# Altium PCB LTC6268_PCB.PcbDoc
Units mm, origin at the board's own origin, x right, y up, seen from the top; angles counter-clockwise.
Board outline 46.8 x 42.34 mm, 2 copper layers (Top Layer, Bottom Layer); 36 components, 28 nets, 91 pads, 1 vias.
Unrouted connection lines stored in the file: 73.
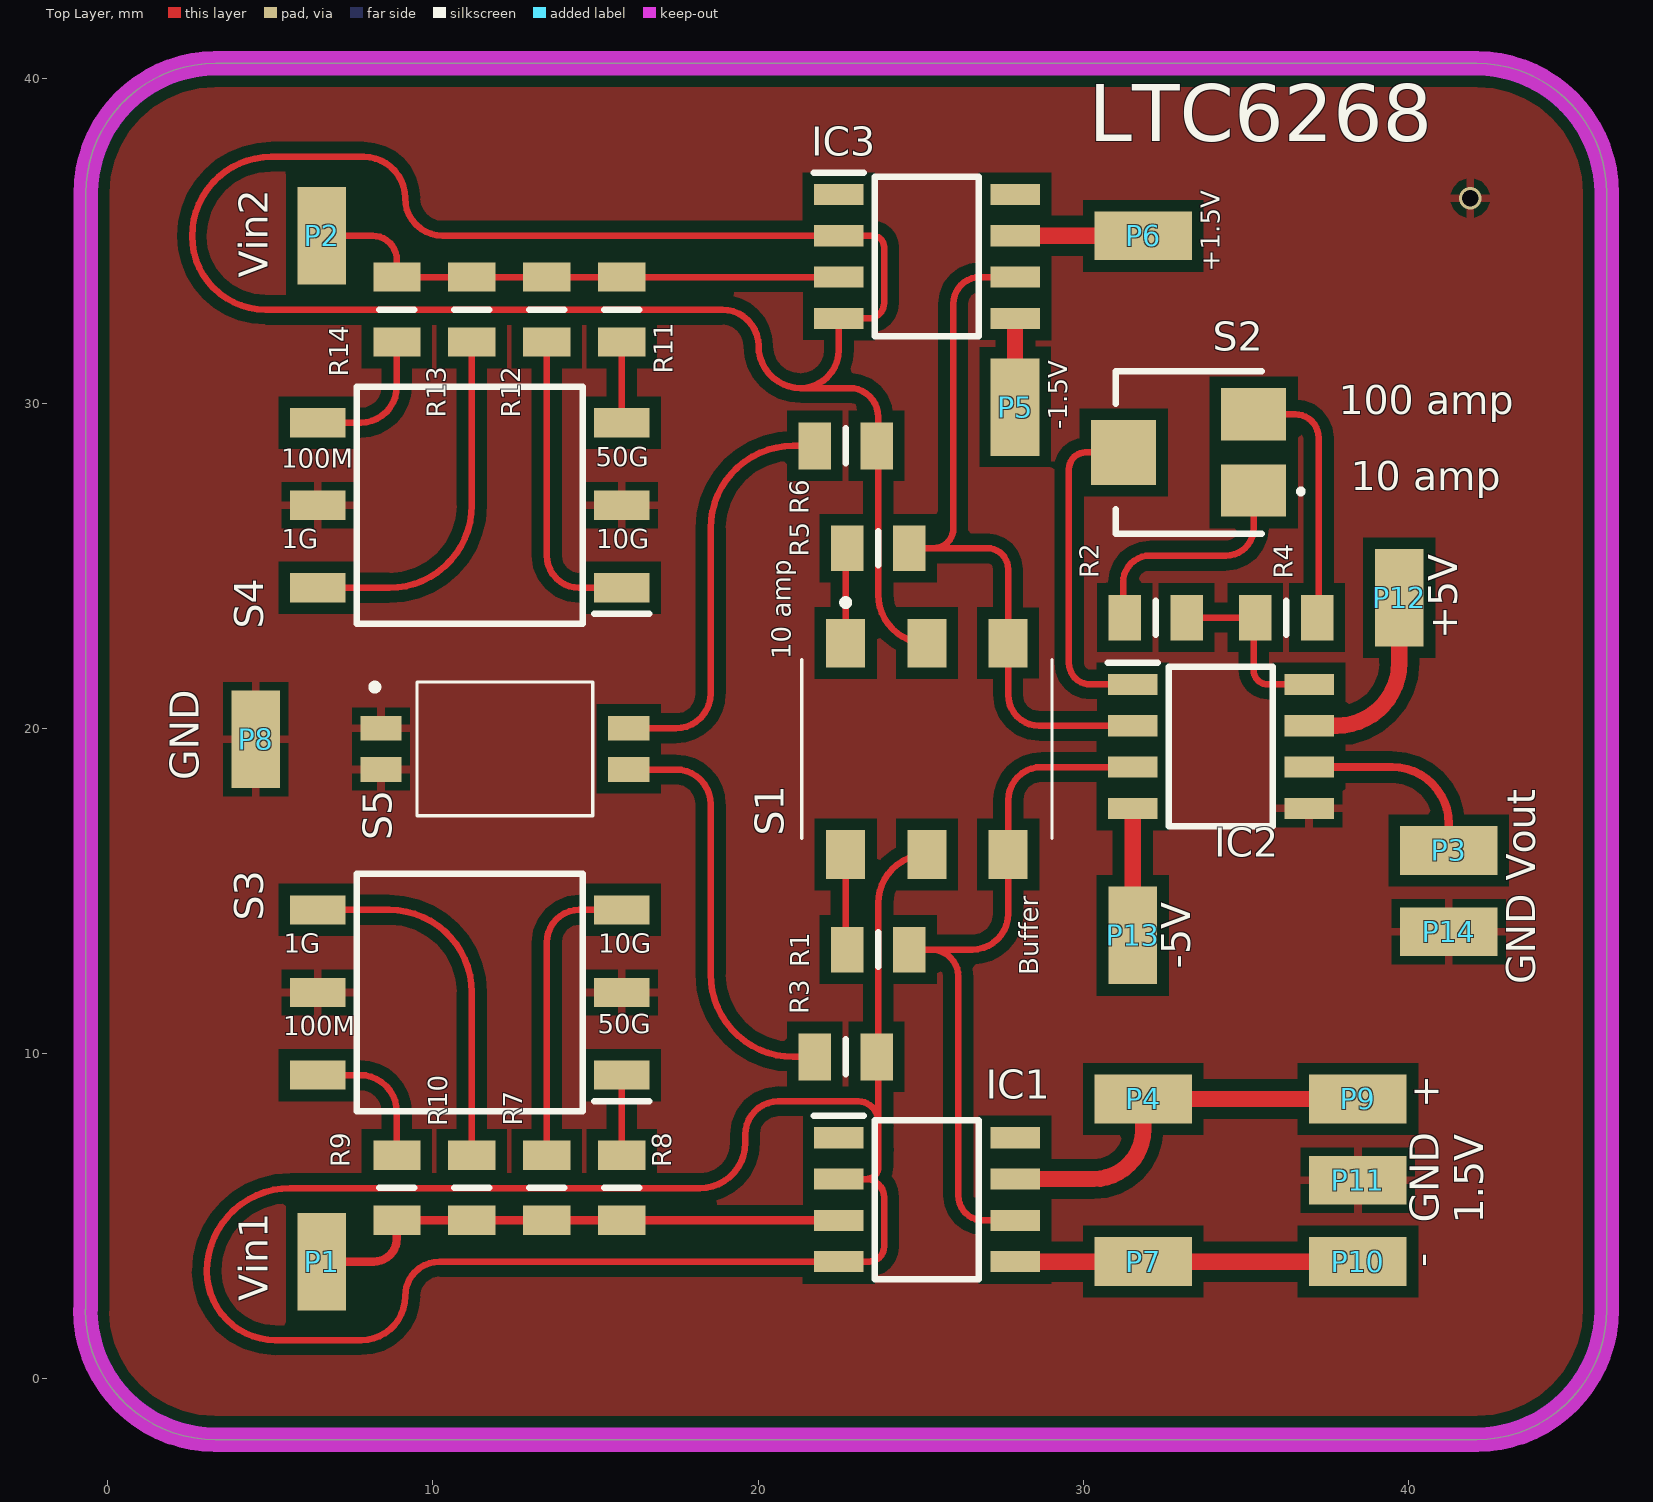
[diagram p0: Top Layer view]
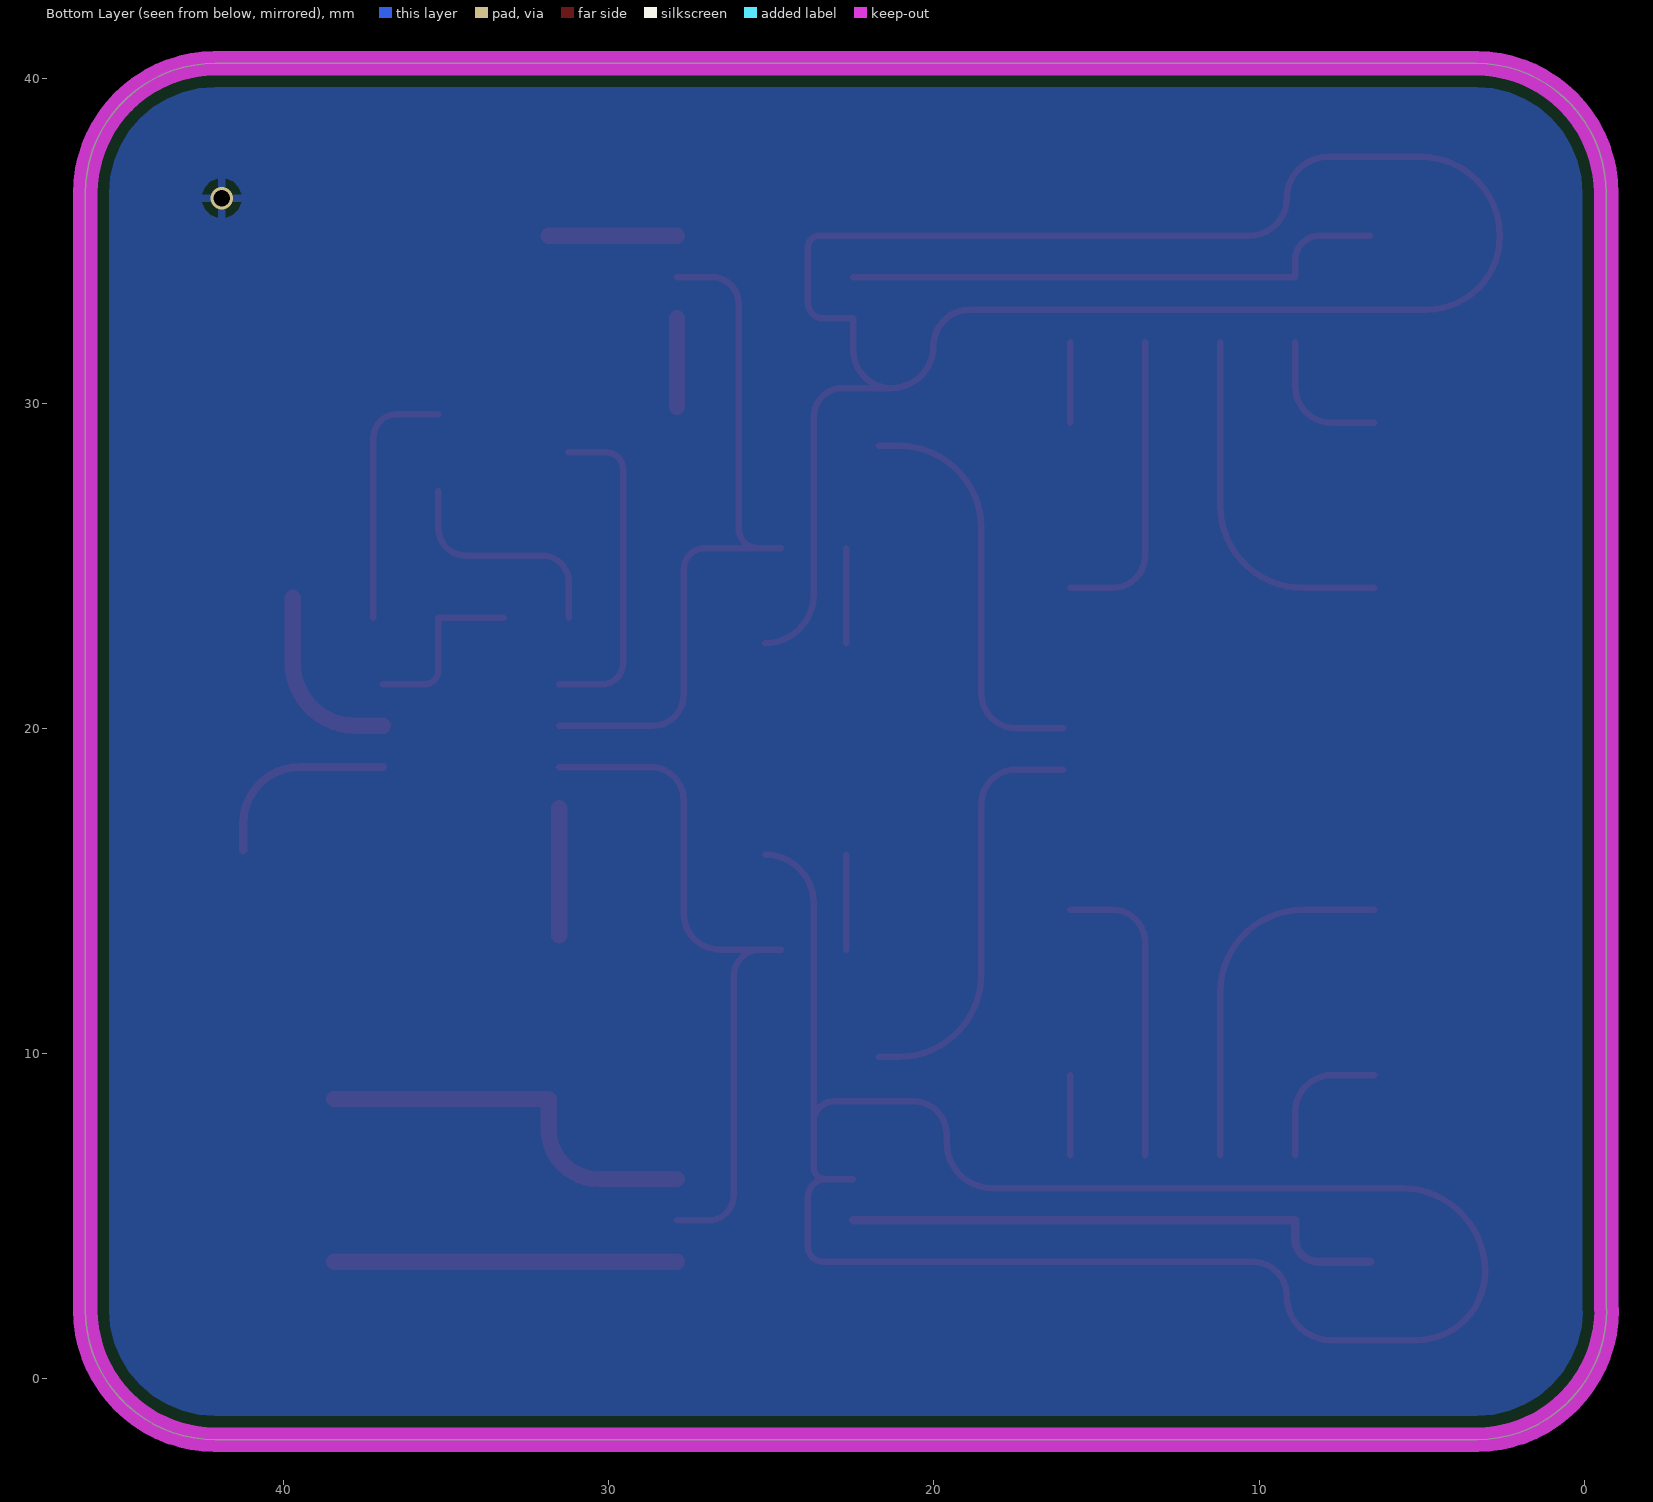
[diagram p1: Bottom Layer view, seen from below]

## Layer stack, top to bottom
Top Solder: solder mask 0.0102, Solder Resist, Dk 3.5
Top Layer: signal copper 0.0356
Dielectric 1: dielectric 0.32, FR-4, Dk 4.8
Bottom Layer: signal copper 0.0356
Bottom Solder: solder mask 0.0102, Solder Resist, Dk 3.5

## Board outline
-0.693,2.128 -0.68,2.141 -0.68,36.469 cw(c3.32,36.469) 3.32,40.469 42.106,40.469 cw(c42.106,36.469) 46.106,36.469 46.106,2.128 cw(c42.106,2.128) 42.106,-1.872 3.307,-1.872 cw(c3.307,2.128)

## Design rules (kind name [scope] priority, off if disabled: settings)
Clearance [All] p1: gap=0.35 ignorepadtopadclearanceinfootprint=FALSE
PolygonConnect [All] p1: connectstyle=Relief reliefconductorwidth=0.254 reliefentries=4 polygonreliefangle="90 Angle" airgapwidth=0.254
RoutingVias [All] p1: holewidth=0.711 width=1.27 viastyle="Through Hole" minholewidth=0.711 minwidth=1.27 maxholewidth=0.711 maxwidth=1.27
SolderMaskExpansion [All] p1: expansion=0.102 istentingtop=FALSE
Width [All] p1: maxlimit=0.5 minlimit=0.2 preferedwidth=0.2 minimp=50.000000 maximp=50.000000 favimp=50.000000
30 further rules are at their usual default settings.

## Components (designator, comment, footprint, x,y, rotation, side; value= is the part's Value field where it differs from the comment)
IC1 "LTC6268IS8-10#PBF" SOIC127P599X175-8N 25.197,5.512 r0 top
IC2 "LT1920IS8#PBF" SOIC127P599X175-8N 34.239,19.456 r0 top
IC3 "LTC6268IS8-10#PBF" SOIC127P599X175-8N 25.197,34.528 r0 top
P1 "Pad" Pad 5.715,2.007 r0 top
P2 "Pad" Pad 7.442,36.763 r180 top
P3 "Pad" Pad 39.649,17.12 r270 top
P4 "Pad" Pad 33.452,7.747 r90 top
P5 "Pad" Pad 28.772,31.496 r180 top
P6 "Pad" Pad 33.452,34.299 r90 top
P7 "Pad" Pad 33.452,2.743 r90 top
P8 "Pad" Pad 5.41,21.28 r180 top
P9 "Pad" Pad 40.056,7.747 r90 top
P10 "Pad" Pad 40.056,2.743 r90 top
P11 "Pad" Pad 40.056,5.245 r90 top
P12 "Pad" Pad 38.862,22.428 r0 top
P13 "Pad" Pad 30.664,12.04 r0 top
P14 "Pad" Pad 39.649,14.618 r270 top
R1 "CRG0805F270R" RESC2012X65N 23.697,13.208 r0 top
R2 "CRG0805F4K7" RESC2012X65N 32.233,23.419 r0 top
R3 "CRGH0805F20R" RESC2013X65N 22.697,9.906 r180 top
R4 "CRG0805F330R" RESC2012X65N 36.246,23.419 r180 top
R5 "CRG0805F270R" RESC2012X65N 23.697,25.552 r0 top
R6 "CRGH0805F20R" RESC2013X65N 22.697,28.702 r180 top
R7 "" RESC2013X50N 13.502,5.877 r90 top
R8 "RH73X2A50GNTN" RESC2013X50N 15.807,5.877 r90 top
R9 "RH73H2A100MKTN" RESC2013X50N 8.89,5.877 r90 top
R10 "RH73W2A1GNTN" RESC2013X50N 11.196,5.877 r90 top
R11 "RH73X2A50GNTN" RESC2013X50N 15.807,32.893 r270 top
R12 "" RESC2013X50N 13.502,32.893 r270 top
R13 "RH73W2A1GNTN" RESC2013X50N 11.196,32.893 r270 top
R14 "RH73H2A100MKTN" RESC2013X50N 8.89,32.893 r270 top
S1 "452403012014" 452403012014 25.197,19.38 r0 top
S2 "CS-4-12YA" CS412YA 33.249,28.499 r90 top
S3 "CS-7-14TB" SOP254P1000X405-6N 11.132,11.887 r180 top
S4 "CS-7-14TB" SOP254P1000X405-6N 11.132,26.873 r180 top
S5 "DS05-127-2-02BK-SMT-TR" DS05127202BKSMTTR 12.212,19.38 r270 top

## Footprints (in the part's own frame and the unit in brackets; to place one, negate y for a bottom-side part, rotate by r counter-clockwise, add the part's x,y. Pads: shape width x height; smd on the part's side, far side on the other; paste and mask are expansions set on the pad)
452403012014 [mm]
  rect 1.2x1.5 smd: 1(-2.5,3.25) 2(0,3.25) 3(2.5,3.25) 4(-2.5,-3.25) 5(0,-3.25) 6(2.5,-3.25)
  silkscreen extent -3.85,-2.75 3.85,4.6, body extent -3.85,-2.75 3.85,2.75, height 4.25
CS412YA [mm]
  rect 1.6x2 smd: 1(-1.175,-2) 2(1.175,-2)
  rect 2x2 smd: 3(0,2)
  silkscreen extent -2.5,-3.5 2.5,2.25, body extent -2.5,-2.84 2.5,2.8, height 2.7
DS05127202BKSMTTR [mm]
  rect 0.76x1.27 smd: 1(-0.635,-3.81) 2(-0.635,3.81) 3(0.635,-3.81) 4(0.635,3.81)
  silkscreen extent -2.05,-4.1 2.05,2.7, body extent -2.05,-4.15 2.05,4.15, height 2.4
Pad [mm]
  rect 1.5x3 smd: 0(0.864,1.6)
RESC2012X65N [mm]
  rect 1x1.4 smd: 1(-0.95,0) 2(0.95,0)
  silkscreen extent 0,-0.53 0,0.53
RESC2013X50N [mm]
  rect 0.9x1.45 smd: 1(-1,0) 2(1,0)
  silkscreen extent 0,-0.54 0,0.54
RESC2013X65N [mm]
  rect 1x1.45 smd: 1(-0.95,0) 2(0.95,0)
  silkscreen extent 0,-0.54 0,0.54, body extent -1,-0.64 1,0.64, height 0.65
SOIC127P599X175-8N [mm]
  rect 1.526x0.65 smd: 1(-2.712,1.905) 2(-2.712,0.635) 3(-2.712,-0.635) 4(-2.712,-1.905) 5(2.712,-1.905) 6(2.712,-0.635) 7(2.712,0.635) 8(2.712,1.905)
  silkscreen extent -3.47,-2.45 1.6,2.58, body extent -3,-2.45 3,2.45, height 1.75
SOP254P1000X405-6N [mm]
  rect 1.7x0.9 smd: 1(-4.675,2.54) 2(-4.675,0) 3(-4.675,-2.54) 4(4.675,-2.54) 5(4.675,0) 6(4.675,2.54)
  silkscreen extent -5.53,-3.65 3.47,3.65, body extent -4.98,-3.57 4.82,3.63, height 2.93

## Part data
IC1 IC3: "Integrated Circuit", Manufacturer_Name="Analog Devices", Mouser Part Number=584-LTC6268IS8-10PBF, Arrow Part Number=LTC6268IS8-10#PBF, Arrow Price/Stock=https://www.arrow.com/en/products/ltc6268is8-10pbf/analog-devices?region=nac, Datasheet Link=https://datasheet.datasheetarchive.com/originals/distributors/Datasheets_SAMA/eb0bf5824ac521a4901f543e1202dae7.pdf, Height=1.752mm, Manufacturer_Part_Number=LTC6268IS8-10#PBF, Mouser Price/Stock=https://www.mouser.co.uk/ProductDetail/Analog-Devices/LTC6268IS8-10PBF?qs=oahfZPh6IAJW%252BkNj5oLlfA%3D%3D
IC2: "Integrated Circuit", Manufacturer_Name="Analog Devices", Mouser Part Number=584-LT1920IS8#PBF, Arrow Part Number=LT1920IS8#PBF, Arrow Price/Stock=https://www.arrow.com/en/products/lt1920is8pbf/analog-devices?region=nac, Datasheet Link=https://datasheet.datasheetarchive.com/originals/distributors/SFDatasheet-4/sf-00091026.pdf, Height=1.752mm, Manufacturer_Part_Number=LT1920IS8#PBF, Mouser Price/Stock=https://www.mouser.co.uk/ProductDetail/Analog-Devices/LT1920IS8PBF?qs=ytflclh7QUWOSod6PqfjSg%3D%3D
R1 R5: "Resistor 270", Manufacturer_Name="TE Connectivity", Mouser Part Number=279-CRG0805F270R, Arrow Part Number=CRG0805F270R, Arrow Price/Stock=https://www.arrow.com/en/products/crg0805f270r/te-connectivity, Datasheet Link=http://www.te.com/commerce/DocumentDelivery/DDEController?Action=showdoc&DocId=Customer+Drawing%7F1623109%7FBA%7Fpdf%7FEnglish%7FENG_CD_1623109_BA.pdf%7F1623109-1, Height=0.65mm, Manufacturer_Part_Number=CRG0805F270R, Mouser Price/Stock=https://www.mouser.com/Search/Refine.aspx?Keyword=279-CRG0805F270R
R2: "Resistor 4.7k", Manufacturer_Name="TE Connectivity", Mouser Part Number=279-CRG0805F4K7, Arrow Part Number=CRG0805F4K7, Arrow Price/Stock=https://www.arrow.com/en/products/crg0805f4k7/te-connectivity?region=nac, Datasheet Link=http://www.te.com/commerce/DocumentDelivery/DDEController?Action=showdoc&DocId=Customer+Drawing%7F1623109%7FBA%7Fpdf%7FEnglish%7FENG_CD_1623109_BA.pdf%7F1623109-1, Height=0.65mm, Manufacturer_Part_Number=CRG0805F4K7, Mouser Price/Stock=https://www.mouser.co.uk/ProductDetail/TE-Connectivity-Holsworthy/CRG0805F4K7?qs=VHcS2MTj4gYTCl8bEMP1DQ%3D%3D
R3 R6: "Resistor 20", Manufacturer_Name="TE Connectivity", Mouser Part Number=279-CRGH0805F20R, Datasheet Link=http://docs-europe.electrocomponents.com/webdocs/12d7/0900766b812d7379.pdf, Height=0.65mm, Manufacturer_Part_Number=CRGH0805F20R, Mouser Price/Stock=https://www.mouser.co.uk/ProductDetail/TE-Connectivity-Holsworthy/CRGH0805F20R?qs=9ylKvqdyudmw671oFSmSiA%3D%3D
R4: "Resistor 330", Manufacturer_Name="TE Connectivity", Mouser Part Number=279-CRG0805F330R, Arrow Part Number=CRG0805F330R, Arrow Price/Stock=https://www.arrow.com/en/products/crg0805f330r/te-connectivity?region=nac, Datasheet Link=http://www.te.com/commerce/DocumentDelivery/DDEController?Action=showdoc&DocId=Customer+Drawing%7F1623109%7FBA%7Fpdf%7FEnglish%7FENG_CD_1623109_BA.pdf%7F1623109-1, Height=0.65mm, Manufacturer_Part_Number=CRG0805F330R, Mouser Price/Stock=https://www.mouser.co.uk/ProductDetail/TE-Connectivity-Holsworthy/CRG0805F330R?qs=VHcS2MTj4gbLzLJ0%2FI3gmA%3D%3D
R7 R12: library part RH73X2A10GNTN, "Resistor", Manufacturer_Name="TE Connectivity", Mouser Part Number=279-RH73X2A10GNTN, Arrow Part Number=RH73X2A10GNTN, Arrow Price/Stock=https://www.arrow.com/en/products/rh73x2a10gntn/te-connectivity?region=nac, Datasheet Link=https://ms.componentsearchengine.com/Datasheets/2/RH73X2A10GNTN.pdf, Height=0.5mm, Manufacturer_Part_Number=RH73X2A10GNTN, Mouser Price/Stock=https://www.mouser.co.uk/ProductDetail/TE-Connectivity-Holsworthy/RH73X2A10GNTN?qs=ip69W3eHERU7YDrLGqSvdQ%3D%3D
R8 R11: "Resistor 50G", Manufacturer_Name="TE Connectivity", Mouser Part Number=279-RH73X2A50GNTN, Datasheet Link=http://www.te.com/commerce/DocumentDelivery/DDEController?Action=showdoc&DocId=Data+Sheet%7F1773268%7FA%7Fpdf%7FEnglish%7FENG_DS_1773268_A.pdf%7F1625862-4, Height=0.5mm, Manufacturer_Part_Number=RH73X2A50GNTN, Mouser Price/Stock=https://www.mouser.co.uk/ProductDetail/TE-Connectivity-Holsworthy/RH73X2A50GNTN?qs=ip69W3eHERVWqEnkYPnkdA%3D%3D
R9 R14: "Resistor 100M", Manufacturer_Name="TE Connectivity", Mouser Part Number=279-RH73H2A100MKTN, Arrow Part Number=RH73H2A100MKTN, Arrow Price/Stock=https://www.arrow.com/en/products/rh73h2a100mktn/te-connectivity?region=nac, Datasheet Link=http://www.te.com/commerce/DocumentDelivery/DDEController?Action=showdoc&DocId=Data+Sheet%7F1773268%7FA%7Fpdf%7FEnglish%7FENG_DS_1773268_A.pdf%7F1625856-2, Height=0.5mm, Manufacturer_Part_Number=RH73H2A100MKTN, Mouser Price/Stock=https://www.mouser.co.uk/ProductDetail/TE-Connectivity-Holsworthy/RH73H2A100MKTN?qs=ip69W3eHERW4mrE8f49Fxw%3D%3D
R10 R13: "Resistor 1G", Manufacturer_Name="TE Connectivity", Mouser Part Number=279-RH73W2A1GNTN, Arrow Part Number=RH73W2A1GNTN, Arrow Price/Stock=https://www.arrow.com/en/products/rh73w2a1gntn/te-connectivity?region=nac, Datasheet Link=https://componentsearchengine.com/Datasheets/2/RH73W2A1GNTN.pdf, Height=0.5mm, Manufacturer_Part_Number=RH73W2A1GNTN, Mouser Price/Stock=https://www.mouser.co.uk/ProductDetail/TE-Connectivity-Holsworthy/RH73W2A1GNTN?qs=ip69W3eHERV4S8tLXHYflA%3D%3D
S1: "Switch", Manufacturer_Name="Wurth Elektronik", Mouser Part Number=710-452403012014, Datasheet Link=https://katalog.we-online.de/em/datasheet/452403012014.pdf, Height=3.3mm, Manufacturer_Part_Number=452403012014, Mouser Price/Stock=https://www.mouser.co.uk/ProductDetail/Wurth-Elektronik/452403012014?qs=DvsTirrhYfOi0QxHyAEO3w%3D%3D
S2: "Switch", Manufacturer_Name="NIDEC COPAL", Datasheet Link=https://www.nidec-copal-electronics.com/j/product/detail/00000197/, Height=2.6mm, Manufacturer_Part_Number=CS-4-12YA
S3 S4: "Switch", Manufacturer_Name="Copal Electronics", Datasheet Link=https://www.nidec-copal-electronics.com/e/catalog/switch/cs-7.pdf, Height=4.05mm, Manufacturer_Part_Number=CS-7-14TB
S5: "Switch", Manufacturer_Name="CUI Devices", Mouser Part Number=490-DS05127202BK-STR, Datasheet Link=https://www.cuidevices.com/product/resource/digikeypdf/ds05-127-smt.pdf, Height=2.6mm, Manufacturer_Part_Number=DS05-127-2-02BK-SMT-TR, Mouser Price/Stock=https://www.mouser.co.uk/ProductDetail/CUI-Devices/DS05-127-2-02BK-SMT-TR?qs=wnTfsH77Xs6TIyf6yhikhg%3D%3D

## Via types
v1: diameter 0.7, hole 0.5, Top Layer to Bottom Layer, 1 vias

## Nets (pads, with @x,y where several pads share a name; then routed paths per layer and width w, separated by ;. In a path a pad name is that pad's centre, name@x,y a point inside that pad or via, vN(x,y) a via of type N, cw(c..) or ccw(c..) an arc to the next point about the centre after c; other vN are vias at no path point)
"1st Res (1)": IC1.2 IC1.4 R3.1 S1.5 | length 62.1
  Top Layer w0.2: IC1.2 23.317,6.147 ; S1.5 ccw(c25.197,14.63) 23.697,14.63 23.697,9.906 23.697,7.926 ; 23.317,6.147 cw(c23.317,5.588) 23.876,5.588 23.876,4.064 cw(c23.419,4.064) 23.419,3.607 IC1.4 10.211,3.607 ccw(c10.211,2.54) 9.144,2.54 cw(c7.798,2.54) 7.798,1.194 5.156,1.194 cw(c5.156,3.302) 3.048,3.302 cw(c5.613,3.302) 5.613,5.867 18.212,5.867 ccw(c18.212,7.264) 19.609,7.264 19.609,7.518 cw(c20.625,7.518) 20.625,8.534 23.089,8.534 cw(c23.089,7.926) 23.697,7.926 ; 23.317,6.147 23.343,6.147 ccw(c23.343,6.501) 23.697,6.501 23.697,7.057 ; 23.697,7.057 cw(c23.897,7.056) 23.697,7.066 ; 23.697,7.057 cw(c23.897,7.056) 23.697,7.066 ; 23.697,7.066 ccw(c23.248,7.092) 23.698,7.092 ; 23.697,7.066 ccw(c23.248,7.092) 23.698,7.092 ; 23.697,7.768 cw(c23.248,7.742) 23.698,7.742 ; 23.697,7.768 cw(c23.248,7.742) 23.698,7.742 ; 23.697,7.768 cw(c23.897,7.778) 23.697,7.777 ; 23.697,7.768 cw(c23.897,7.778) 23.697,7.777 ; 23.697,7.777 23.697,7.926 ; 23.698,7.092 23.698,7.742
"1st Res (2)": IC3.2 IC3.4 R6.1 S1.2 | length 62.6
  Top Layer w0.2: S1.2 cw(c25.197,24.13) 23.697,24.13 23.697,28.702 23.697,29.592 ccw(c22.809,29.592) 22.809,30.48 21.311,30.48 ; 21.311,30.48 cw(c21.311,31.775) 20.015,31.775 ccw(c18.898,31.775) 18.898,32.893 4.851,32.893 cw(c4.851,35.153) 2.591,35.153 cw(c5.029,35.153) 5.029,37.592 7.874,37.592 cw(c7.874,36.322) 9.144,36.322 ccw(c10.303,36.322) 10.303,35.163 IC3.2 23.536,35.163 cw(c23.536,34.823) 23.876,34.823 23.876,33.096 cw(c23.403,33.096) 23.403,32.623 IC3.4 22.485,31.654 cw(c21.311,31.654) 21.311,30.48
"2nd Res": IC2.1 S2.3 | length 10.3
  Top Layer w0.2: S2.3 30.074,28.499 ccw(c30.074,27.991) 29.566,27.991 29.566,22.022 ccw(c30.226,22.022) 30.226,21.361 IC2.1
"10 amp (1)": R1.1 S1.4 | length 2.9
  Top Layer w0.2: R1.1@22.697,13.208 S1.4
"10 amp (2)": R5.1 S1.1 | length 2.9
  Top Layer w0.2: S1.1 R5.1@22.697,25.552
"10 amp (2nd)": R2.1 S2.1 | length 7.2
  Top Layer w0.2: R2.1@31.233,23.419 31.233,24.502 cw(c32.055,24.502) 32.055,25.324 34.392,25.324 ccw(c34.392,26.181) 35.249,26.181 S2.1
"100 amp (2nd)": R4.1 S2.2 | length 7.9
  Top Layer w0.2: S2.2 36.519,29.674 cw(c36.519,28.947) 37.246,28.947 R4.1@37.246,23.419
+1.5V: IC1.7 IC3.7 P4.0 P6.0 P9.0 | length 16.3
  Top Layer w0.5: IC1.7 30.328,6.147 ccw(c30.328,7.671) 31.852,7.671 P4.0 P9.0 ; IC3.7 P6.0
+5V: IC2.7 P12.0 | length 5.9
  Top Layer w0.5: IC2.7 37.795,20.091 ccw(c37.795,22.022) 39.726,22.022 P12.0
-1.5V: IC1.5 IC3.5 P5.0 P7.0 P10.0 | length 13.3
  Top Layer w0.5: IC1.5 P7.0 P10.0 ; P5.0 IC3.5
-5V: IC2.4 P13.0 | length 3.9
  Top Layer w0.5: P13.0 IC2.4
"Buffer (1)": IC1.6 IC2.3 R1.2 S1.6 | length 21.8
  Top Layer w0.2: R1.2@24.697,13.208 26.594,13.208 ccw(c26.594,14.311) 27.697,14.311 27.697,17.795 cw(c28.724,17.795) 28.724,18.821 IC2.3 ; 25.324,13.208 cw(c25.324,12.37) 26.162,12.37 26.162,5.639 ccw(c26.924,5.639) 26.924,4.877 IC1.6
"Buffer (2)": IC2.2 IC3.6 R5.2 S1.3 | length 21.8
  Top Layer w0.2: R5.2@24.697,25.552 27.051,25.552 cw(c27.051,24.907) 27.697,24.907 S1.3 27.697,21.042 ccw(c28.647,21.042) 28.647,20.091 IC2.2 ; 25.4,25.552 ccw(c25.4,26.162) 26.01,26.162 26.01,33.071 cw(c26.832,33.071) 26.832,33.893 IC3.6
GND: IC2.5 P8.0 P11.0 P14.0 S3.2 S3.5 S4.2 S4.5 S5.1 S5.3
  other v1: 41.91,36.322
NetIC2_8: IC2.8 R2.2 R4.2 | length 5.6
  Top Layer w0.2: R2.2@33.233,23.419 35.246,23.419 35.246,21.803 ccw(c35.687,21.803) 35.687,21.361 IC2.8
NetR7_2: R7.2 S3.3 | length 9.4
  Top Layer w0.2: R7.2 13.502,13.425 cw(c14.503,13.425) 14.503,14.427 S3.3
NetR8_2: R8.2 S3.1 | length 2.5
  Top Layer w0.2: R8.2 S3.1
NetR9_2: R9.2 S3.6 | length 4.4
  Top Layer w0.2: S3.6 7.747,9.347 cw(c7.747,8.204) 8.89,8.204 R9.2
NetR10_2: R10.2 S3.4 | length 11.2
  Top Layer w0.2: S3.4 8.656,14.427 cw(c8.656,11.887) 11.196,11.887 R10.2
NetR11_2: R11.2 S4.3 | length 2.5
  Top Layer w0.2: S4.3 R11.2
NetR12_2: R12.2 S4.1 | length 9.4
  Top Layer w0.2: R12.2 13.502,25.335 ccw(c14.503,25.335) 14.503,24.333 S4.1
NetR13_2: R13.2 S4.6 | length 11.2
  Top Layer w0.2: S4.6 8.656,24.333 ccw(c8.656,26.873) 11.196,26.873 R13.2
NetR14_2: R14.2 S4.4 | length 4.4
  Top Layer w0.2: S4.4 7.772,29.413 ccw(c7.772,30.531) 8.89,30.531 R14.2
Rg1: R3.2 S5.4 | length 13
  Top Layer w0.2: S5.4 17.475,18.745 cw(c17.475,17.678) 18.542,17.678 18.542,12.446 ccw(c21.082,12.446) 21.082,9.906 R3.2@21.697,9.906
Rg2: R6.2 S5.2 | length 12.8
  Top Layer w0.2: S5.2 17.475,20.015 ccw(c17.475,21.082) 18.542,21.082 18.542,26.162 cw(c21.082,26.162) 21.082,28.702 R6.2@21.697,28.702
Vin1: IC1.3 P1.0 R7.1 R8.1 R9.1 R10.1 | length 16.9
  Top Layer w0.254: P1.0 8.179,3.607 ccw(c8.179,4.318) 8.89,4.318 R9.1 R10.1 R7.1 R8.1 IC1.3
Vin2: IC3.3 P2.0 R11.1 R12.1 R13.1 R14.1 | length 16.9
  Top Layer w0.2: P2.0 8.144,35.163 cw(c8.144,34.417) 8.89,34.417 R14.1 R13.1 R12.1 R11.1 IC3.3
Vout: IC2.6 P3.0 | length 6.1
  Top Layer w0.254: IC2.6 39.505,18.821 cw(c39.505,17.077) 41.25,17.077 P3.0
pads on no net: IC1.1 IC1.8 IC3.1 IC3.8

## Polygon pours and split planes (outlines as drawn)
GND on Bottom Layer "GND_L02_P003" (solid, pour order 3): -0.711,36.437 cw(c3.339,36.437) 3.339,40.488 42.087,40.488 cw(c42.087,36.473) 46.101,36.473 46.101,2.123 cw(c42.099,2.123) 42.099,-1.88 3.314,-1.88 cw(c3.314,2.146) -0.711,2.146 -0.711,28.092
GND on Top Layer "GND_L01_P000" (solid, pour order 0): -0.686,36.463 cw(c3.339,36.463) 3.339,40.488 42.087,40.488 cw(c42.087,36.473) 46.101,36.473 46.101,2.123 cw(c42.099,2.123) 42.099,-1.88 3.314,-1.88 cw(c3.314,2.12) -0.686,2.12 -0.686,24.816

## Keep-outs
Keep-Out Layer:
  lines w0.762: 3.307,40.469 42.106,40.469 cw(c42.106,36.469) 46.106,36.469 46.106,2.128 cw(c42.106,2.128) 42.106,-1.872 3.307,-1.872 cw(c3.307,2.128) -0.693,2.128 -0.68,2.141 -0.68,36.469 cw(c3.32,36.469) 3.32,40.469

## Silkscreen, mask and mechanical layers (free items; w line width, h text height)
Top Overlay:
  text "LTC6268" at 30.175,37.49 h3
  text "+1.5V" at 34.409,34.061 h1 r90
  text "Vin2" at 5.207,33.867 h1.52 r90
  text "100 amp" at 37.871,29.388 h1.52
  text "-1.5V" at 29.71,29.21 h1 r90
  text "50G" at 15.011,27.872 h1
  text "100M" at 5.334,27.821 h1
  text "10 amp" at 38.232,27.038 h1.52
  text "1G" at 5.356,25.349 h1
  text "10G" at 15.029,25.349 h1
  text "+5V" at 41.796,22.758 h1.52 r90
  text "10 amp" at 21.207,22.13 h1 r90
  text "GND" at 3.092,18.408 h1.52 r90
  text "Vout" at 44.202,15.316 h1.52 r90
  text "1G" at 5.411,12.908 h1
  text "10G" at 15.084,12.908 h1
  text "-5V" at 33.592,12.624 h1.52 r90
  text "Buffer" at 28.821,12.421 h1 r90
  text "GND" at 44.209,12.141 h1.52 r90
  text "50G" at 15.066,10.427 h1
  text "100M" at 5.389,10.376 h1
  text "+" at 41.237,8.331 h1.52 r90
  text "GND" at 41.237,4.801 h1.52 r90
  text "1.5V" at 42.609,4.775 h1.52 r90
  text "-" at 41.133,3.429 h1.52 r90
  text "Vin1" at 5.207,2.382 h1.52 r90